# Altium PCB board1.PcbDoc
Units mil, origin at the board's own origin, x right, y up, seen from the top; angles counter-clockwise.
Board outline 3465 x 3690 mil, 2 copper layers (Top Layer, Bottom Layer); 50 components, 30 nets, 284 pads, 65 vias.
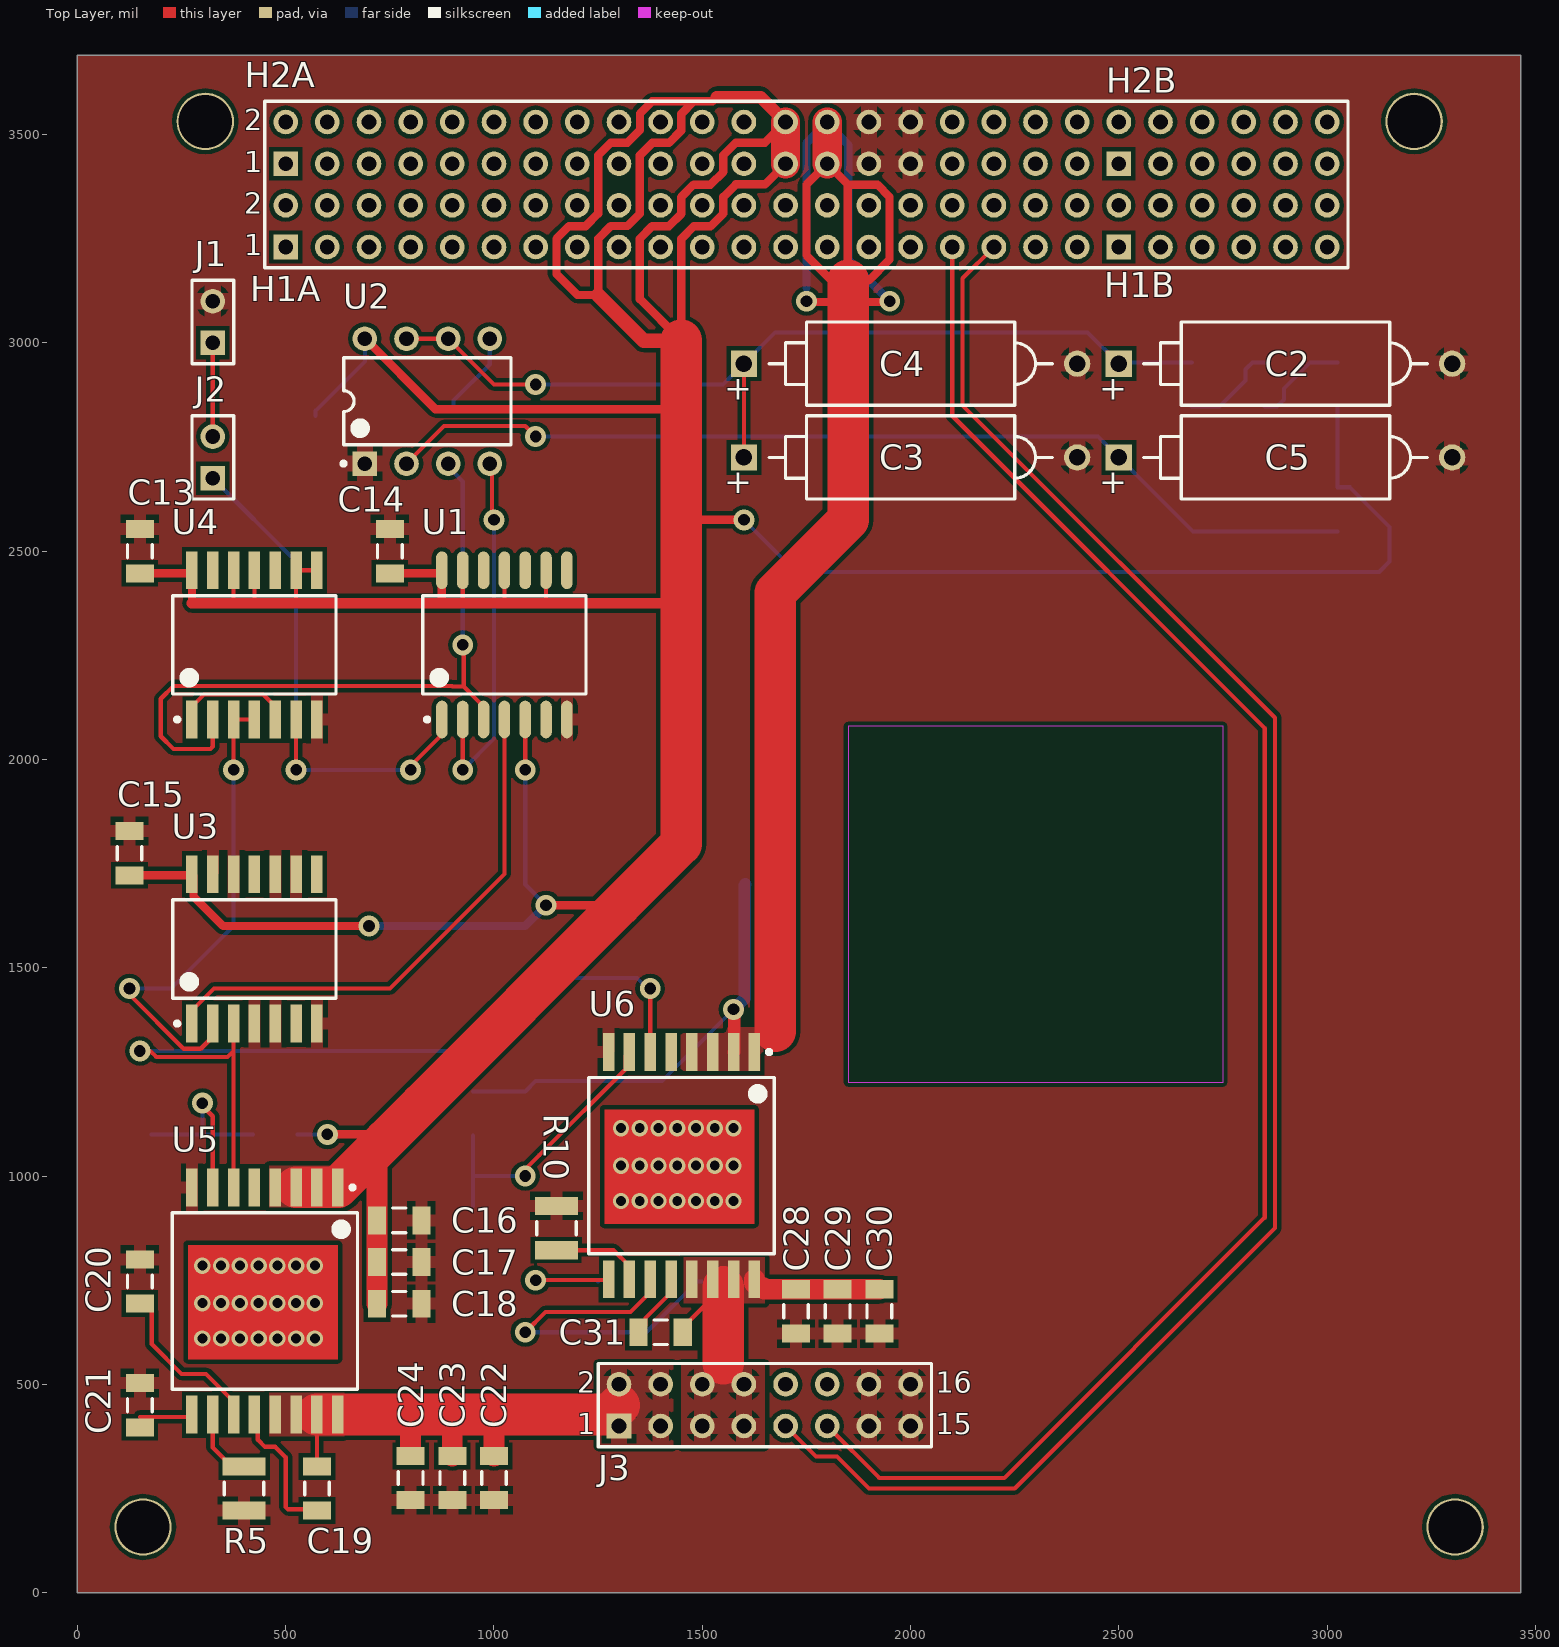
[diagram p0: Top Layer view]
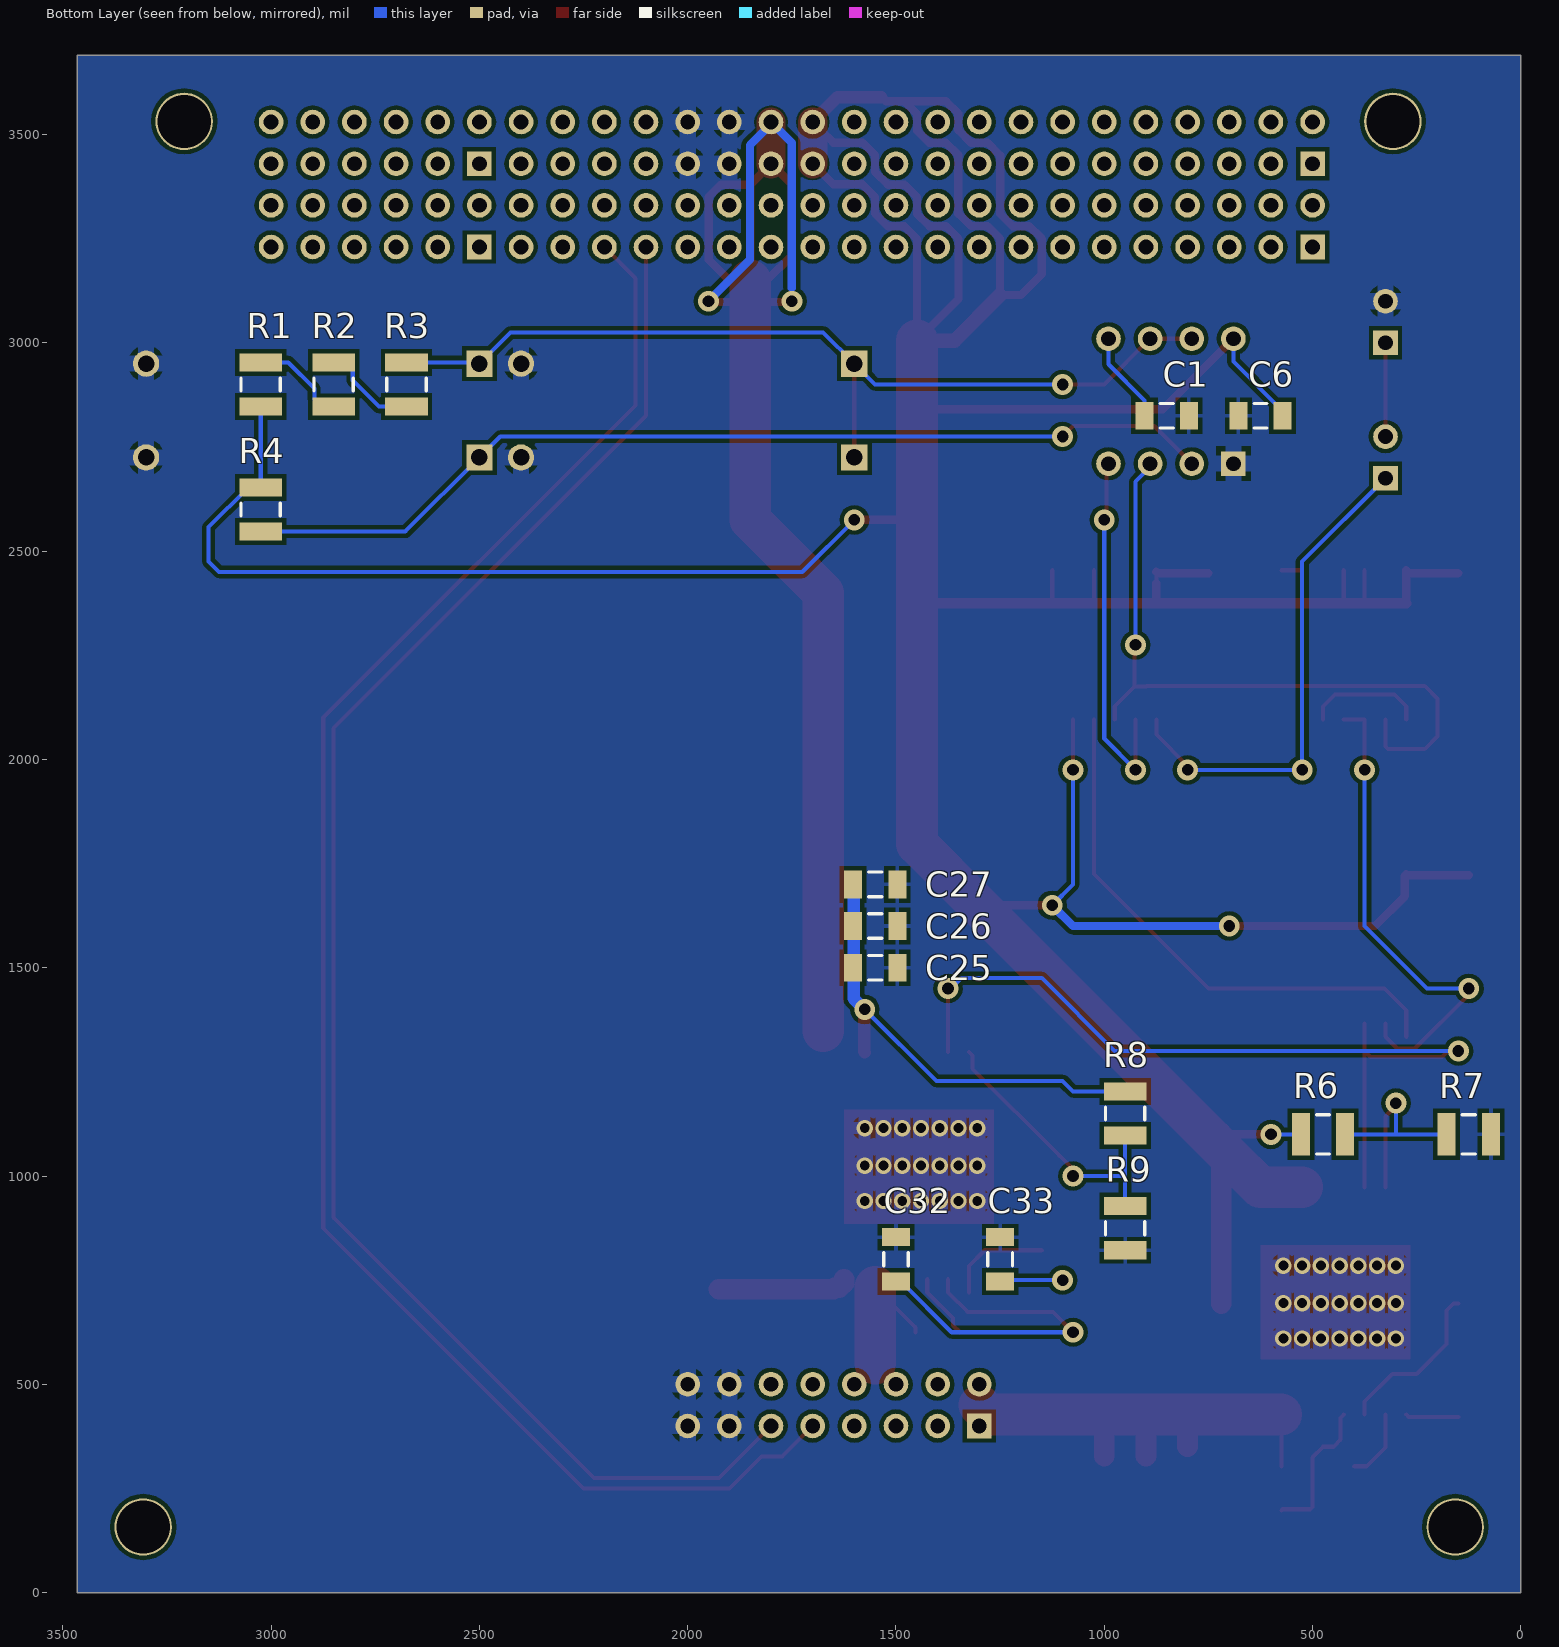
[diagram p1: Bottom Layer view, seen from below]

## Layer stack, top to bottom
Top Solder: solder mask 0.4, Solder Resist, Dk 3.5
Top Layer: signal copper 1.4
Dielectric 1: dielectric 12.6, FR-4, Dk 4.8
Bottom Layer: signal copper 1.4
Bottom Solder: solder mask 0.4, Solder Resist, Dk 3.5

## Board outline
0,0 0,3690 3465,3690 3465,0

## Design rules (kind name [scope] priority, off if disabled: settings)
Clearance Clearance_11 [InNamedPolygon('3V3_L01_P009')] p1: gap=10 ignorepadtopadclearanceinfootprint=FALSE except(0: Arc-Hole Track-Hole SMDPad-Hole THPad-Hole Via-Hole Fill-Hole Poly-Hole Region-Hole Text-Hole)
Clearance Clearance_10 [InNamedPolygon('3V3_L01_P009')] p2: gap=0 ignorepadtopadclearanceinfootprint=FALSE
Clearance Clearance_9 [InNamedPolygon('3V3_L01_P009')] p3: gap=10 ignorepadtopadclearanceinfootprint=FALSE except(0: Arc-Hole Track-Hole SMDPad-Hole THPad-Hole Via-Hole Fill-Hole Poly-Hole Region-Hole Text-Hole)
Clearance Clearance_8 [InNamedPolygon('3V3_L01_P009')] p4: gap=0 ignorepadtopadclearanceinfootprint=FALSE
Clearance Clearance_7 [InNamedPolygon('3V3_L01_P009')] p5: gap=10 ignorepadtopadclearanceinfootprint=FALSE
Clearance Clearance_6 [InNamedPolygon('3V3_L01_P009')] p6: gap=1 ignorepadtopadclearanceinfootprint=FALSE
Clearance Clearance_5 [InNamedPolygon('3V3_L01_P009')] p7: gap=0 ignorepadtopadclearanceinfootprint=FALSE
Clearance Clearance_4 [InNamedPolygon('GND_L01_P008')] p8: gap=10 ignorepadtopadclearanceinfootprint=FALSE except(0: Arc-Hole Track-Hole SMDPad-Hole THPad-Hole Via-Hole Fill-Hole Poly-Hole Region-Hole Text-Hole)
Clearance Clearance_3 [InNamedPolygon('tg')] p9: gap=0 ignorepadtopadclearanceinfootprint=FALSE
Clearance Clearance_2 [InNamedPolygon('5VLOAD_L01_P005')] p10: gap=0 ignorepadtopadclearanceinfootprint=FALSE
Clearance Clearance_1 [InNamedPolygon('tg')] p11: gap=0 ignorepadtopadclearanceinfootprint=FALSE
Clearance [All] p12: gap=10 ignorepadtopadclearanceinfootprint=FALSE except(0: Arc-Hole Track-Hole SMDPad-Hole THPad-Hole Via-Hole Fill-Hole Poly-Hole Region-Hole Text-Hole)
ComponentClearance ComponentClearance_4 [InComponent('H2B')] p1: gap=0 collisioncheckmode=3 verticalgap=0 showdistances=FALSE
ComponentClearance ComponentClearance_3 [InComponent('H2A')] p2: gap=0 collisioncheckmode=3 verticalgap=0 showdistances=FALSE
ComponentClearance ComponentClearance_2 [InComponent('H1B')] p3: gap=0 collisioncheckmode=3 verticalgap=0 showdistances=FALSE
ComponentClearance [InComponent('H1A')] p4: gap=0 collisioncheckmode=3 verticalgap=0 showdistances=FALSE
ComponentClearance ComponentClearance_1 [All] p5: gap=10 collisioncheckmode=3 verticalgap=10 showdistances=FALSE
PolygonConnect PolygonConnect_24 [All vs IsNamedPolygon('GND_L01_P008')] p1: thpad.connectstyle=Relief thpad.reliefconductorwidth=40 thpad.reliefentries=4 thpad.polygonreliefangle="90 Angle" thpad.airgapwidth=12 smdpad.connectstyle=Relief smdpad.reliefconductorwidth=30 smdpad.reliefentries=4 smdpad.polygonreliefangle="90 Angle" smdpad.airgapwidth=12 via.connectstyle=Relief via.reliefconductorwidth=30 via.reliefentries=4 via.polygonreliefangle="90 Angle" via.airgapwidth=10
PolygonConnect PolygonConnect_23 [All vs IsNamedPolygon('3V3LOAD_L01_P000')] p2: thpad.connectstyle=Relief thpad.reliefconductorwidth=10 thpad.reliefentries=4 thpad.polygonreliefangle="90 Angle" thpad.airgapwidth=10 smdpad.connectstyle=Direct smdpad.reliefconductorwidth=10 smdpad.reliefentries=4 smdpad.polygonreliefangle="90 Angle" smdpad.airgapwidth=10 via.connectstyle=Relief via.reliefconductorwidth=10 via.reliefentries=4 via.polygonreliefangle="90 Angle" via.airgapwidth=10
PolygonConnect PolygonConnect_22 [All vs IsNamedPolygon('ed')] p3: thpad.connectstyle=Relief thpad.reliefconductorwidth=40 thpad.reliefentries=4 thpad.polygonreliefangle="90 Angle" thpad.airgapwidth=12 smdpad.connectstyle=Relief smdpad.reliefconductorwidth=10 smdpad.reliefentries=4 smdpad.polygonreliefangle="90 Angle" smdpad.airgapwidth=10 via.connectstyle=Relief via.reliefconductorwidth=10 via.reliefentries=4 via.polygonreliefangle="90 Angle" via.airgapwidth=10
PolygonConnect PolygonConnect_21 [All vs IsNamedPolygon('ed')] p4: thpad.connectstyle=Relief thpad.reliefconductorwidth=40 thpad.reliefentries=4 thpad.polygonreliefangle="90 Angle" thpad.airgapwidth=10 smdpad.connectstyle=Relief smdpad.reliefconductorwidth=10 smdpad.reliefentries=4 smdpad.polygonreliefangle="90 Angle" smdpad.airgapwidth=10 via.connectstyle=Relief via.reliefconductorwidth=10 via.reliefentries=4 via.polygonreliefangle="90 Angle" via.airgapwidth=10
PolygonConnect PolygonConnect_20 [All vs IsNamedPolygon('ed')] p5: connectstyle=Direct reliefconductorwidth=10 reliefentries=4 polygonreliefangle="90 Angle" airgapwidth=10
PolygonConnect PolygonConnect_19 [All vs IsNamedPolygon('ed')] p6: thpad.connectstyle=Relief thpad.reliefconductorwidth=10 thpad.reliefentries=4 thpad.polygonreliefangle="90 Angle" thpad.airgapwidth=10 smdpad.connectstyle=Direct smdpad.reliefconductorwidth=10 smdpad.reliefentries=4 smdpad.polygonreliefangle="90 Angle" smdpad.airgapwidth=10 via.connectstyle=Relief via.reliefconductorwidth=10 via.reliefentries=4 via.polygonreliefangle="90 Angle" via.airgapwidth=10
PolygonConnect PolygonConnect_18 [All vs IsNamedPolygon('3V3_L01_P009')] p7: thpad.connectstyle=Relief thpad.reliefconductorwidth=10 thpad.reliefentries=4 thpad.polygonreliefangle="90 Angle" thpad.airgapwidth=10 smdpad.connectstyle=Direct smdpad.reliefconductorwidth=10 smdpad.reliefentries=4 smdpad.polygonreliefangle="90 Angle" smdpad.airgapwidth=10 via.connectstyle=Relief via.reliefconductorwidth=10 via.reliefentries=4 via.polygonreliefangle="90 Angle" via.airgapwidth=10
PolygonConnect PolygonConnect_17 [All vs IsNamedPolygon('3V3_L01_P009')] p8: thpad.connectstyle=Relief thpad.reliefconductorwidth=10 thpad.reliefentries=4 thpad.polygonreliefangle="90 Angle" thpad.airgapwidth=10 smdpad.connectstyle=Direct smdpad.reliefconductorwidth=10 smdpad.reliefentries=4 smdpad.polygonreliefangle="90 Angle" smdpad.airgapwidth=10 via.connectstyle=Relief via.reliefconductorwidth=10 via.reliefentries=4 via.polygonreliefangle="90 Angle" via.airgapwidth=10
PolygonConnect PolygonConnect_16 [All vs IsNamedPolygon('GND_L01_P008')] p9: thpad.connectstyle=Relief thpad.reliefconductorwidth=40 thpad.reliefentries=4 thpad.polygonreliefangle="90 Angle" thpad.airgapwidth=12 smdpad.connectstyle=Relief smdpad.reliefconductorwidth=10 smdpad.reliefentries=4 smdpad.polygonreliefangle="90 Angle" smdpad.airgapwidth=10 via.connectstyle=Relief via.reliefconductorwidth=40 via.reliefentries=4 via.polygonreliefangle="90 Angle" via.airgapwidth=12
PolygonConnect PolygonConnect_15 [All vs IsNamedPolygon('GND_L02_P003')] p10: thpad.connectstyle=Relief thpad.reliefconductorwidth=40 thpad.reliefentries=4 thpad.polygonreliefangle="90 Angle" thpad.airgapwidth=12 smdpad.connectstyle=Relief smdpad.reliefconductorwidth=10 smdpad.reliefentries=4 smdpad.polygonreliefangle="90 Angle" smdpad.airgapwidth=10 via.connectstyle=Relief via.reliefconductorwidth=40 via.reliefentries=4 via.polygonreliefangle="90 Angle" via.airgapwidth=12
PolygonConnect PolygonConnect_14 [All vs IsNamedPolygon('5VLOAD_L01_P002')] p11: thpad.connectstyle=Relief thpad.reliefconductorwidth=10 thpad.reliefentries=4 thpad.polygonreliefangle="90 Angle" thpad.airgapwidth=10 smdpad.connectstyle=Direct smdpad.reliefconductorwidth=10 smdpad.reliefentries=4 smdpad.polygonreliefangle="90 Angle" smdpad.airgapwidth=10 via.connectstyle=Relief via.reliefconductorwidth=10 via.reliefentries=4 via.polygonreliefangle="90 Angle" via.airgapwidth=10
PolygonConnect PolygonConnect_13 [All vs IsNamedPolygon('5VLOAD_L01_P005')] p12: thpad.connectstyle=Relief thpad.reliefconductorwidth=40 thpad.reliefentries=4 thpad.polygonreliefangle="90 Angle" thpad.airgapwidth=12 smdpad.connectstyle=Relief smdpad.reliefconductorwidth=10 smdpad.reliefentries=4 smdpad.polygonreliefangle="90 Angle" smdpad.airgapwidth=10 via.connectstyle=Relief via.reliefconductorwidth=10 via.reliefentries=4 via.polygonreliefangle="90 Angle" via.airgapwidth=10
PolygonConnect PolygonConnect_12 [All vs IsNamedPolygon('GND_L02_P003')] p13: thpad.connectstyle=Relief thpad.reliefconductorwidth=40 thpad.reliefentries=4 thpad.polygonreliefangle="90 Angle" thpad.airgapwidth=12 smdpad.connectstyle=Relief smdpad.reliefconductorwidth=10 smdpad.reliefentries=4 smdpad.polygonreliefangle="90 Angle" smdpad.airgapwidth=10 via.connectstyle=Relief via.reliefconductorwidth=10 via.reliefentries=4 via.polygonreliefangle="90 Angle" via.airgapwidth=10
PolygonConnect PolygonConnect_11 [All vs IsNamedPolygon('tg')] p14: thpad.connectstyle=Relief thpad.reliefconductorwidth=50 thpad.reliefentries=4 thpad.polygonreliefangle="90 Angle" thpad.airgapwidth=15 smdpad.connectstyle=Relief smdpad.reliefconductorwidth=10 smdpad.reliefentries=4 smdpad.polygonreliefangle="90 Angle" smdpad.airgapwidth=10 via.connectstyle=Relief via.reliefconductorwidth=10 via.reliefentries=4 via.polygonreliefangle="90 Angle" via.airgapwidth=10
PolygonConnect PolygonConnect_10 [All vs IsNamedPolygon('GND_L02_P003')] p15: thpad.connectstyle=Relief thpad.reliefconductorwidth=50 thpad.reliefentries=4 thpad.polygonreliefangle="90 Angle" thpad.airgapwidth=10 smdpad.connectstyle=Relief smdpad.reliefconductorwidth=10 smdpad.reliefentries=4 smdpad.polygonreliefangle="90 Angle" smdpad.airgapwidth=10 via.connectstyle=Relief via.reliefconductorwidth=10 via.reliefentries=4 via.polygonreliefangle="90 Angle" via.airgapwidth=10
PolygonConnect PolygonConnect_9 [All vs IsNamedPolygon('GND_L02_P003')] p16: thpad.connectstyle=Relief thpad.reliefconductorwidth=50 thpad.reliefentries=4 thpad.polygonreliefangle="90 Angle" thpad.airgapwidth=10 smdpad.connectstyle=Relief smdpad.reliefconductorwidth=10 smdpad.reliefentries=4 smdpad.polygonreliefangle="90 Angle" smdpad.airgapwidth=10 via.connectstyle=Relief via.reliefconductorwidth=10 via.reliefentries=4 via.polygonreliefangle="90 Angle" via.airgapwidth=10
PolygonConnect PolygonConnect_8 [All vs IsNamedPolygon('5V_L01_P007')] p17: thpad.connectstyle=Relief thpad.reliefconductorwidth=10 thpad.reliefentries=4 thpad.polygonreliefangle="90 Angle" thpad.airgapwidth=10 smdpad.connectstyle=Direct smdpad.reliefconductorwidth=10 smdpad.reliefentries=4 smdpad.polygonreliefangle="90 Angle" smdpad.airgapwidth=10 via.connectstyle=Relief via.reliefconductorwidth=10 via.reliefentries=4 via.polygonreliefangle="90 Angle" via.airgapwidth=10
PolygonConnect PolygonConnect_7 [All vs IsNamedPolygon('tg')] p18: thpad.connectstyle=Relief thpad.reliefconductorwidth=10 thpad.reliefentries=4 thpad.polygonreliefangle="90 Angle" thpad.airgapwidth=10 smdpad.connectstyle=Direct smdpad.reliefconductorwidth=10 smdpad.reliefentries=4 smdpad.polygonreliefangle="90 Angle" smdpad.airgapwidth=10 via.connectstyle=Relief via.reliefconductorwidth=10 via.reliefentries=4 via.polygonreliefangle="90 Angle" via.airgapwidth=10
PolygonConnect PolygonConnect_6 [All vs IsNamedPolygon('tg')] p19: thpad.connectstyle=Direct thpad.reliefconductorwidth=10 thpad.reliefentries=4 thpad.polygonreliefangle="90 Angle" thpad.airgapwidth=10 smdpad.connectstyle=Relief smdpad.reliefconductorwidth=10 smdpad.reliefentries=4 smdpad.polygonreliefangle="90 Angle" smdpad.airgapwidth=10 via.connectstyle=Relief via.reliefconductorwidth=10 via.reliefentries=4 via.polygonreliefangle="90 Angle" via.airgapwidth=10
PolygonConnect PolygonConnect_5 [All vs IsNamedPolygon('tg')] p20: thpad.connectstyle=Direct thpad.reliefconductorwidth=10 thpad.reliefentries=4 thpad.polygonreliefangle="90 Angle" thpad.airgapwidth=10 smdpad.connectstyle=Relief smdpad.reliefconductorwidth=10 smdpad.reliefentries=4 smdpad.polygonreliefangle="90 Angle" smdpad.airgapwidth=10 via.connectstyle=Relief via.reliefconductorwidth=10 via.reliefentries=4 via.polygonreliefangle="90 Angle" via.airgapwidth=10
PolygonConnect PolygonConnect_4 [All vs IsNamedPolygon('tg')] p21: thpad.connectstyle=Direct thpad.reliefconductorwidth=10 thpad.reliefentries=4 thpad.polygonreliefangle="90 Angle" thpad.airgapwidth=10 smdpad.connectstyle=Relief smdpad.reliefconductorwidth=10 smdpad.reliefentries=4 smdpad.polygonreliefangle="90 Angle" smdpad.airgapwidth=10 via.connectstyle=Relief via.reliefconductorwidth=10 via.reliefentries=4 via.polygonreliefangle="90 Angle" via.airgapwidth=10
PolygonConnect PolygonConnect_3 [All vs IsNamedPolygon('tg')] p22: thpad.connectstyle=Direct thpad.reliefconductorwidth=10 thpad.reliefentries=4 thpad.polygonreliefangle="90 Angle" thpad.airgapwidth=10 smdpad.connectstyle=Relief smdpad.reliefconductorwidth=10 smdpad.reliefentries=4 smdpad.polygonreliefangle="90 Angle" smdpad.airgapwidth=10 via.connectstyle=Relief via.reliefconductorwidth=10 via.reliefentries=4 via.polygonreliefangle="90 Angle" via.airgapwidth=10
PolygonConnect PolygonConnect_2 [All vs IsNamedPolygon('5VLOAD_L01_P005')] p23: thpad.connectstyle=Relief thpad.reliefconductorwidth=50 thpad.reliefentries=4 thpad.polygonreliefangle="90 Angle" thpad.airgapwidth=10 smdpad.connectstyle=Relief smdpad.reliefconductorwidth=10 smdpad.reliefentries=4 smdpad.polygonreliefangle="90 Angle" smdpad.airgapwidth=10 via.connectstyle=Relief via.reliefconductorwidth=10 via.reliefentries=4 via.polygonreliefangle="90 Angle" via.airgapwidth=10
PolygonConnect PolygonConnect_1 [All vs IsNamedPolygon('tt')] p24: thpad.connectstyle=Relief thpad.reliefconductorwidth=10 thpad.reliefentries=4 thpad.polygonreliefangle="90 Angle" thpad.airgapwidth=10 smdpad.connectstyle=Direct smdpad.reliefconductorwidth=10 smdpad.reliefentries=4 smdpad.polygonreliefangle="90 Angle" smdpad.airgapwidth=10 via.connectstyle=Relief via.reliefconductorwidth=10 via.reliefentries=4 via.polygonreliefangle="90 Angle" via.airgapwidth=10
PolygonConnect [All] p25: connectstyle=Relief reliefconductorwidth=10 reliefentries=4 polygonreliefangle="90 Angle" airgapwidth=10
RoomDefinition board1 [InComponentClass('board1')] p1: confinementstyle=ConfineIn formatcopy=TRUE lockcomponents=FALSE outline 0,3800 3450,3800 3450,0 0,0
RoutingVias [All] p1: holewidth=28 width=50 viastyle="Through Hole" minholewidth=28 minwidth=50 maxholewidth=28 maxwidth=50
SilkToSilkClearance SilkToSilkClearance_1 [(InComponent('H1A') OR InComponent('H1B') OR InComponent('H2A') OR InComponent('H2B'))] p1: silktosilkclearance=0
SilkToSilkClearance [All] p2: silktosilkclearance=10
SolderMaskExpansion [All] p1: expansion=4 istentingtop=FALSE
Width [All] p1: maxlimit=100 minlimit=10 preferedwidth=10 minimp=50.000000 maximp=50.000000 favimp=50.000000
28 further rules are at their usual default settings.

## Components (designator, comment, footprint, x,y, rotation, side; value= is the part's Value field where it differs from the comment)
C1 "Cap Semi" C1206 850,2825 r180 bottom value=10nF
C2 "Cap Pol2" POLAR0.8 2900,2950 r180 top value=1800uF
C3 "Cap Pol2" POLAR0.8 2000,2725 r180 top value=1800uF
C4 "Cap Pol2" POLAR0.8 2000,2950 r180 top value=1800uF
C5 "Cap Pol2" POLAR0.8 2900,2725 r180 top value=1800uF
C6 "Cap Semi" C1206 625,2825 r0 bottom value=100n
C13 "Cap Semi" C1206 150,2500 r270 top value=100nF
C14 "Cap Semi" C1206 750,2500 r90 top value=100nF
C15 "Cap Semi" C1206 125,1775 r270 top value=100nF
C16 "Cap Semi" C1206 772.34,893.46 r180 top value=100nF
C17 "Cap Semi" C1206 772.34,793.46 r180 top value=10uF
C18 "Cap Semi" C1206 772.34,693.46 r180 top value=220uF
C19 "Cap Semi" C1206 575,250 r270 top value=220nF
C20 "Cap Semi" C1206 150,746.85 r90 top value=220nF
C21 "Cap Semi" C1206 150,450 r90 top value=110nF
C22 "Cap Semi" C1206 1000,275 r90 top value=220uF
C23 "Cap Semi" C1206 900,275 r90 top value=10uF
C24 "Cap Semi" C1206 800,275 r90 top value=100nF
C25 "Cap Semi" C1206 1550,1500 r0 bottom value=220uF
C26 "Cap Semi" C1206 1550,1600 r0 bottom value=10uF
C27 "Cap Semi" C1206 1550,1700 r0 bottom value=100nF
C28 "Cap Semi" C1206 1725,675 r90 top value=220uF
C29 "Cap Semi" C1206 1825,675 r90 top value=10uF
C30 "Cap Semi" C1206 1925,675 r90 top value=100nF
C31 "Cap Semi" C1206 1400,625 r180 top value=220nF
C32 "Cap Semi" C1206 1500,800 r90 bottom value=220nF
C33 "Cap Semi" C1206 1250,800 r90 bottom value=110nF
H1A "Header 20X2" HDR2X20 500,3230 r0 top locked
H1B "Header 6X2" HDR2X6 2500,3230 r0 top locked
H2A "Header 20X2" HDR2X20 500,3430 r0 top locked
H2B "Header 6X2" HDR2X6 2500,3430 r0 top locked
J1 "Switch 1" HDR1X2 325,3000 r90 top
J2 "Switch 2" HDR1X2 325,2675 r90 top
J3 "Header 8X2" HDR2X8 1300,400 r0 top
R1 "Res3" 14-1210 3025,2900 r270 bottom value=132K
R2 "Res3" 14-1210 2850,2900 r270 bottom value=132K
R3 "Res3" 14-1210 2675,2900 r270 bottom value=73K
R4 "Res3" 14-1210 3025,2600 r90 bottom value=100K
R5 "Res3" 14-1210 400,250 r270 top value=10K
R6 "Res3" 14-1210 475,1100 r0 bottom value=100K
R7 "Res3" 14-1210 125,1100 r0 bottom value=12K
R8 "Res3" 14-1210 950,1150 r90 bottom value=100K
R9 "Res3" 14-1210 950,875 r90 bottom value=20K
R10 "Res3" 14-1210 1150,875 r90 top value=10K
U1 "SN54LS14-SP" SN54LS14-SP 1025,2275 r90 top
U2 "SE555-SP" P0008A 840,2860 r90 top
U3 "SN54LS08-SP" SN54LS08-SP 425,1545 r90 top
U4 "SN54LS02-SP" SN54LS02-SP 425,2275 r90 top
U5 "TPS7H2201-SP" TPS7H2201-SP 450,700 r270 top
U6 "TPS7H2201-SP" TPS7H2201-SP 1450,1025 r270 top

## Footprints (in the part's own frame and the unit in brackets; to place one, negate y for a bottom-side part, rotate by r counter-clockwise, add the part's x,y. Pads: shape width x height; smd on the part's side, far side on the other; paste and mask are expansions set on the pad)
14-1210 [mm] "Chip Resistor, Body 3.2x2.5mm, IPC High Density"
  rect 1.1x2.6 smd: 1(-1.35,0) 2(1.35,0)
  silkscreen extent -0.4,-1.2 0.4,1.2, body extent -1.68,-1.32 1.68,1.32, height 0.9
C1206 [mm] "Chip Capacitor, Body 3.2x1.6mm, IPC High Density"
  rect 1.1x1.7 smd: 1(-1.35,0) 2(1.35,0)
  silkscreen extent -0.4,-0.75 0.4,0.75, body extent -1.7,-0.9 1.7,0.9, height 1.3
HDR1X2 [mm] "Connector; Header; 2 Position"
  rect 1.5x1.5 hole 0.9: 1(0,0)
  round 1.5 hole 0.9: 2(2.54,0)
  silkscreen extent -1.27,-1.27 3.81,1.27
HDR2X6 [mm] "Connector; Header; 6x2 Position"
  rect 1.5x1.5 hole 0.9: 1(0,0)
  round 1.5 hole 0.9: 2(0,2.54) 3(2.54,0) 4(2.54,2.54) 5(5.08,0) 6(5.08,2.54) 7(7.62,0) 8(7.62,2.54) 9(10.16,0) 10(10.16,2.54) 11(12.7,0) 12(12.7,2.54)
  silkscreen extent -1.27,-1.27 13.97,3.81
HDR2X8 [mm] "Connector; Header; 8x2 Position"
  rect 1.5x1.5 hole 0.9: 1(0,0)
  round 1.5 hole 0.9: 2(0,2.54) 3(2.54,0) 4(2.54,2.54) 5(5.08,0) 6(5.08,2.54) 7(7.62,0) 8(7.62,2.54) 9(10.16,0) 10(10.16,2.54) 11(12.7,0) 12(12.7,2.54) 13(15.24,0) 14(15.24,2.54) 15(17.78,0) 16(17.78,2.54)
  silkscreen extent -1.27,-1.27 19.05,3.81
HDR2X20 [mm] "Connector; Header; 20x2 Position"
  rect 1.5x1.5 hole 0.9: 1(0,0)
  round 1.5 hole 0.9: 2(0,2.54) 3(2.54,0) 4(2.54,2.54) 5(5.08,0) 6(5.08,2.54) 7(7.62,0) 8(7.62,2.54) 9(10.16,0) 10(10.16,2.54) 11(12.7,0) 12(12.7,2.54) 13(15.24,0) 14(15.24,2.54) 15(17.78,0) 16(17.78,2.54) 17(20.32,0) 18(20.32,2.54) 19(22.86,0) 20(22.86,2.54) 21(25.4,0) 22(25.4,2.54) 23(27.94,0) 24(27.94,2.54) 25(30.48,0) 26(30.48,2.54) 27(33.02,0) 28(33.02,2.54) 29(35.56,0) 30(35.56,2.54) 31(38.1,0) 32(38.1,2.54) 33(40.64,0) 34(40.64,2.54) 35(43.18,0) 36(43.18,2.54) 37(45.72,0) 38(45.72,2.54) 39(48.26,0) 40(48.26,2.54)
  silkscreen extent -1.27,-1.27 49.53,3.81
P0008A [mm] "DIP, 8-Leads, Body 10.15x6.6mm, Pitch 2.54mm"
  rect 1.5x1.5 hole 0.9: 1(-3.81,3.81)
  round 1.5 hole 0.9: 2(-3.81,1.27) 3(-3.81,-1.27) 4(-3.81,-3.81) 5(3.81,-3.81) 6(3.81,-1.27) 7(3.81,1.27) 8(3.81,3.81)
  silkscreen extent -3.93,-5.1 2.65,5.23, body extent -3.95,-5.07 3.95,5.07, height 5.08
POLAR0.8 [mm] "Polarized Capacitor; 2 Leads"
  rect 1.6x1.6 hole 1: 1(10.16,0)
  round 1.6 hole 1: 2(-10.16,0)
  silkscreen extent -8.64,-2.54 8.64,2.54
SN54LS02-SP [mm] "NOR gate"
  rect 2.3x0.7 smd: 1(-4.55,3.81) 2(-4.55,2.54) 3(-4.55,1.27) 4(-4.55,0) 5(-4.55,-1.27) 6(-4.55,-2.54) 7(-4.55,-3.81) 8(4.55,-3.81) 9(4.55,-2.54) 10(4.55,-1.27) 11(4.55,0) 12(4.55,1.27) 13(4.55,2.54) 14(4.55,3.81)
  silkscreen extent -4.67,-4.97 3,4.97, body extent -5.29,-4.95 5.29,4.95, height 2.03
SN54LS08-SP [mm]
  rect 2.3x0.7 smd: 1(-4.55,3.81) 2(-4.55,2.54) 3(-4.55,1.27) 4(-4.55,0) 5(-4.55,-1.27) 6(-4.55,-2.54) 7(-4.55,-3.81) 8(4.55,-3.81) 9(4.55,-2.54) 10(4.55,-1.27) 11(4.55,0) 12(4.55,1.27) 13(4.55,2.54) 14(4.55,3.81)
  silkscreen extent -4.67,-4.97 3,4.97, body extent -3.3,-4.95 3.3,4.95, height 2.03
SN54LS14-SP [mm] "CFP, 14-Leads, Body 9.91x6.60mm (max), Pitch 1.27mm, IPC Medium Density"
  oval 2.3x0.7 smd: 1(-4.55,3.81) 2(-4.55,2.54) 3(-4.55,1.27) 4(-4.55,0) 5(-4.55,-1.27) 6(-4.55,-2.54) 7(-4.55,-3.81) 8(4.55,-3.81) 9(4.55,-2.54) 10(4.55,-1.27) 11(4.55,0) 12(4.55,1.27) 13(4.55,2.54) 14(4.55,3.81)
  silkscreen extent -4.67,-4.97 3,4.97, body extent -3.3,-4.95 3.3,4.95, height 2.03
TPS7H2201-SP [mm]
  rect 2.3x0.7 smd: 1(-6.925,4.445) 2(-6.925,3.175) 3(-6.925,1.905) 4(-6.925,0.635) 5(-6.925,-0.635) 6(-6.925,-1.905) 7(-6.925,-3.175) 8(-6.925,-4.445) 9(6.925,-4.445) 10(6.925,-3.175) 11(6.925,-1.905) 12(6.925,-0.635) 13(6.925,0.635) 14(6.925,1.905) 15(6.925,3.175) 16(6.925,4.445)
  Top Layer region: -3.429,-4.699 3.556,-4.699 3.556,4.445 -3.429,4.445
  silkscreen extent -7.05,-5.65 5.38,5.65, body extent -4.94,-5.63 4.94,5.63, height 2.34

## Part data
C1 C6 C13 C14 C15 C16 C17 C18 C19 C20 C21 C22 C23 C24 C25 C26 C27 C28 C29 C30 C31 C32 C33: "Capacitor (Semiconductor SIM Model)", LatestRevisionDate=29-May-2009, LatestRevisionNote="IPC-7351 Footprint Added.", PackageDescription="Chip Capacitor", PackageReference=C1206, Published=8-Jun-2000, Publisher="Altium Limited"
C2 C3 C4 C5: "Polarized Capacitor (Axial)", LatestRevisionDate=17-Jul-2002, LatestRevisionNote="Re-released for DXP Platform.", PackageDescription="Polarized Capacitor; 2 Leads", PackageReference=POLAR0.8, Published=8-Jun-2000, Publisher="Altium Limited"
H1A H2A: "Header, 20-Pin, Dual row", LatestRevisionDate=17-Jul-2002, LatestRevisionNote="Re-released for DXP Platform.", Publisher="Altium Limited"
H1B H2B: "Header, 6-Pin, Dual row", LatestRevisionDate=17-Jul-2002, LatestRevisionNote="Re-released for DXP Platform.", Publisher="Altium Limited"
J1 J2: library part "Header 2", "Header, 2-Pin", LatestRevisionDate=17-Jul-2002, LatestRevisionNote="Re-released for DXP Platform.", Publisher="Altium Limited"
J3: "Header, 8-Pin, Dual row", LatestRevisionDate=17-Jul-2002, LatestRevisionNote="Re-released for DXP Platform.", Publisher="Altium Limited"
R1 R2 R3 R4 R5 R6 R7 R8 R9 R10: "Resistor", LatestRevisionDate=29-May-2009, LatestRevisionNote="IPC-7351 Footprint Added.", PackageDescription="Chip Resistor", Published=8-Jun-2000, Publisher="Altium Limited"
  R1: PackageReference=14-1210
  R2 R3 R4 R5 R6 R7 R8 R9 R10: PackageReference=J1-0603
U1: "Invertor"
U2: library part CMP-2000-04954-1, "Precision Timer, 4.5 to 16 V, -55 to 125 degC, 8-Pin DIP, Pb-Free, Tube", Manufacturer=TexasInstruments, Maximum High Level Output Current=-200mA, Maximum Low Level Output Current=200mA, Operating Supply Voltage=5, Package=8PDIP, Package Description="8-Pin Double In-line Package, Body 9.59 x 6.35 mm, Pitch 2.54 mm", Package Reference=P8, Category=Timer, Datasheet URL=http://www.ti.com/general/docs/lit/getliterature.tsp?genericPartNumber=NE555&fileType=pdf, Datasheet Version="Rev. I, 09/2014", Manufacturer URL=http://www.ti.com/, Number of Internal Timers=1, Package URL=http://www.ti.com/lit/ml/mpdi001b/mpdi001b.pdf, Packaging=Rail/Tube, Rad Hard=No, Type=Standard
U3: "AND gate"
U4: "NOR gate"

## Free pads (board coordinates)
  round 137.8 hole 127.95: MOUNT1(307.09,3531.5) MOUNT2(3208.66,3531.5) MOUNT3(157.48,157.48) MOUNT4(3307.09,157.48)

## Via types
v1: diameter 39.37, hole 23.62, Top Layer to Bottom Layer, 42 vias
v2: diameter 50, hole 28, Top Layer to Bottom Layer, 23 vias

## Nets (pads, with @x,y where several pads share a name; then routed paths per layer and width w, separated by ;. In a path a pad name is that pad's centre, name@x,y a point inside that pad or via, vN(x,y) a via of type N, cw(c..) or ccw(c..) an arc to the next point about the centre after c; other vN are vias at no path point)
3V3: C25.2 C26.2 C27.2 H2A.27 H2A.28 R8.2 U6.1 U6.2 U6.3 U6.4 | length 5289.2
  Top Layer w20: v2(1750,3100) 1751.82,3098.18 1850,3098.18 1948.18,3098.18 v2(1950,3100) ; 1850,3150 1900,3150 1949.53,3199.53 1949.53,3350.51 1920.52,3379.53 1850.47,3379.53 1849.53,3380.47 ; 1849.53,3380.47 1849.53,3150.47 1809.48,3150.47 1750,3209.96 1750,3380 H2A.27 1849.53,3380.47
  Top Layer w30: U6.2 1576.22,1298.86 1576.22,1398.78 v2(1575,1400)
  Top Layer w70: H2A.27 H2A.28
  Top Layer w100: 1675,1347.64 1675,2400 1850,2575 1850,3098.18 1850,3150
  Bottom Layer w10: R8.2 1075,1203.15 1100,1228.15 1403.15,1228.15 v2(1575,1400) ; v2(1750,3100) 1750,3131.57 ; H2A.28@1800,3525 H2A.28
  Bottom Layer w20: 1750,3131.57 1750,3480 H2A.28 ; H2A.28@1800,3525 1850.47,3474.53 1850.47,3199.53 v2(1950,3100)
  Bottom Layer w30: v2(1575,1400) 1601.57,1426.57 1601.57,1698.43 C27.2
3V3LOAD: C28.2 C29.2 C30.2 C31.1 J3.5 J3.6 J3.7 J3.8 U6.13 U6.14 U6.15 U6.16 | length 664.1
  Top Layer w10: C31.1 1453.15,636.81 1550,733.66 1550,750
  Top Layer w50: U6.16 1625,743.31 1636.22,732.09 1645.28,732.09 1649.21,728.15 C28.2 C29.2 C30.2
  Top Layer w100: 1550,550 1550,733.66
5V: C6.1 C13.2 C14.1 C15.2 C16.2 C17.2 C18.2 H2A.25 H2A.26 R1.2 R4.2 R6.2 U1.5 U1.9 U1.11 U1.13 U1.14 U2.8 U3.14 U4.8 U4.9 U4.11 U4.12 U4.14 U5.1 U5.2 U5.3 U5.4 | length 13676.6
  Top Layer w10: U4.14@267.72,2446.85 U4.14 ; U3.14@272.72,1721.85 U3.14 ; 375,2375 U4.12 ; 425,2375 U4.11 ; 525,2375 U4.9 U4.8 ; U1.14@875,2422.64 875,2450.34 U1.14 ; 925,2375 U1.13 ; 1025,2375 U1.11 ; v2(1075,1975) U1.5 ; 1125,2375 U1.9 ; 1430.49,2840.96 1449.53,2860 ; 1459.41,2640 1459.41,2660 ; 1684.53,3474.53 1700,3490
  Top Layer w20: C15.2 U3.14@272.72,1721.85 ; C13.2 U4.14@267.72,2446.85 ; U3.14 278.78,1720.35 278.78,1671.22 350,1600 v2(700,1600) ; 275,2375 U4.14 ; v2(600,1100) 725,1100 738.68,1086.32 ; U2.8 859.04,2840.96 1430.49,2840.96 ; C14.1 871.51,2446.85 U1.14@875,2450.34 ; 875,2375 U1.14@875,2422.64 ; v2(1125,1650) 1302.36,1650 1338.68,1686.32 ; 1419.06,2975 1449.53,3005.47 ; 1449.53,2575 v2(1600,2575) ; 1450,3005 1449.53,3005.47 ; 1535,3590 1524.53,3579.53 1479.48,3579.53 ; H2A.26@1680,3510 1650.47,3480.47 1580.43,3480.47 1550.47,3450.51 1550.47,3410.43 1519.57,3379.53 1479.48,3379.53 1449.53,3349.57 1449.53,3309.49 1420.04,3280 1379.96,3280 1350,3250.04 1350,3105 1449.53,3005.47 ; H2A.25 1650.47,3380.47 1580.43,3380.47 1550.47,3350.51 1550.47,3310.43 1519.57,3279.53 1479.48,3279.53 1449.53,3249.57 1449.53,3005.47 ; 1479.48,3579.53 1379.48,3579.53 1350.47,3550.51 1350.47,3510.43 1320.51,3480.47 1280.43,3480.47 1250,3450.04 1250,3309.96 1220.28,3280.24 1180.19,3280.24 1150,3250.04 1150,3165 1200,3115 1250,3115 1250.47,3114.53 1250.47,3250.51 1280.31,3280.35 1320.4,3280.35 1350.24,3310.19 1350.24,3450.28 1379.96,3480 1420.04,3480 1449.53,3509.49 1449.53,3549.57 1479.48,3579.53
  Top Layer w25: 275,2375 375,2375 425,2375 525,2375 875,2375 925,2375 1025,2375 1125,2375 1449.53,2375
  Top Layer w30: 701.18,1048.82 719.19,1030.81 ; 738.68,1086.32 746.85,1078.15 ; 1535,3590 1640,3590 H2A.26
  Top Layer w35: 1250.47,3114.53 1359.53,3005.47 1449.53,3005.47
  Top Layer w50: C18.2 C17.2 C16.2 719.19,1030.81
  Top Layer w70: H2A.25 1700,3490 H2A.26
  Top Layer w100: U5.3 U5.2 U5.1 701.18,1048.82 738.68,1086.32 826.18,1173.82 1302.36,1650 1449.53,1797.17 1449.53,2375 1449.53,2575 1449.53,2860 1449.53,3005.47
  Bottom Layer w10: R6.2 v2(600,1100) ; C6.1 571.85,2836.81 690,2954.96 U2.8 ; v2(1075,1975) 1075,1700 v2(1125,1650) ; v2(1600,2575) 1725,2450 3125,2450 3150,2475 3150,2557.68 3054.53,2653.15 R4.2 R1.2
  Bottom Layer w20: v2(700,1600) 1075,1600 v2(1125,1650)
5VLOAD: C19.1 C22.2 C23.2 C24.2 J3.1 J3.2 J3.3 J3.4 U5.13 U5.14 U5.15 U5.16 | length 1148.5
  Top Layer w10: C19.1 U5.15 ; 1250,460 1260,450
  Top Layer w50: 800,350 800,427.36 ; C23.2 900,427.36 ; C22.2 1000,427.36
  Top Layer w100: U5.15 U5.16 800,427.36 900,427.36 1000,427.36 1277.36,427.36 1300,450
AND1A: U1.4 U3.1 | length 1319.6
  Top Layer w10: U3.1@275,1334.37 U3.1 275,1397.36 327.64,1450 750,1450 1025,1725 U1.4
AND1B: U3.2 U4.3 U4.4 | length 1169.7
  Top Layer w10: v2(125,1450) 125,1435.6 255.01,1305.59 296.22,1305.59 325,1334.37 U3.2 ; v2(375,1975) U4.3 U4.4
  Bottom Layer w10: v2(125,1450) 225,1450 375,1600 v2(375,1975)
AND1Y: U3.3 U5.6 U6.6 | length 2090.4
  Top Layer w10: v2(150,1300) 175,1300 189.41,1285.59 360.59,1285.59 375,1300 ; U5.6 375,1300 ; U3.3 375,1300 ; U6.6 v2(1375,1450)
  Bottom Layer w10: v2(150,1300) 975,1300 1150,1475 1343.43,1475 1368.43,1450 v2(1375,1450)
EPS_RX: H1A.33 J3.11 | length 4001.3
  Top Layer w10: J3.11 1925,275 2225,275 2850,900 2850,2075 2100,2825 H1A.33
EPS_TX: H1A.35 J3.9 | length 4192.7
  Top Layer w10: J3.9 1773.2,326.8 1823.2,326.8 1825.54,324.45 1900,250 2250,250 2875,875 2875,2100 2125,2850 2125,3155 H1A.35
GND: C1.2 C2.2 C3.2 C4.2 C5.2 C6.2 C13.1 C14.2 C15.1 C16.1 C17.1 C18.1 C20.2 C21.2 C22.1 C23.1 C24.1 C25.1 C26.1 C27.1 C28.1 C29.1 C30.1 C32.2 C33.2 H2A.29 H2A.30 H2A.31 H2A.32 J1.2 J3.13 J3.14 J3.15 J3.16 R5.2 R7.1 R9.1 R10.2 U1.7 U2.1 U3.4 U3.5 U3.7 U3.9 U3.10 U3.12 U3.13 U4.7 U5.8 U6.8
  other v1: 300,610 345,610 390,610 435,610 480,610 525,610 570,610 300,695 345,695 390,695 435,695 480,695 525,695 570,695 300,785 345,785 390,785 435,785 480,785 525,785 570,785 1305,940 1350,940 1395,940 1440,940 1485,940 1530,940 1575,940 1305,1025 1350,1025 1395,1025 1440,1025 1485,1025 1530,1025 1575,1025 1305,1115 1350,1115 1395,1115 1440,1115 1485,1115 1530,1115 1575,1115
NetC1_1: C1.1 U2.5 | length 196
  Bottom Layer w10: C1.1@903.15,2850 903.15,2861.81 990,2948.66 U2.5
NetC2_1: C2.1 C3.1 C4.1 R3.1 U2.6 U2.7 | length 2277.2
  Top Layer w10: U2.7 U2.6 1000,2900 v2(1100,2900) ; C3.1 C4.1 ; C2.1@2473.5,2976.5 C2.1
  Bottom Layer w10: v2(1100,2900) 1550,2900 C4.1 1675,3025 2425,3025 C2.1 2503.15,2953.15 R3.1
NetC5_1: C5.1 R4.1 U2.2 | length 2377.1
  Top Layer w10: U2.2 880,2800 1075,2800 v2(1100,2775)
  Bottom Layer w10: v2(1100,2775) 2450,2775 C5.1 2678.15,2546.85 R4.1
NetC19_2: C19.2 U5.12 | length 345.9
  Top Layer w10: U5.12 432.91,419.45 432.91,367.09 450,350 475,350 500,325 500,205.86 505.86,200 571.85,200 C19.2
NetC20_1: C20.1 U5.11 | length 400.9
  Top Layer w10: C20.1 161.81,693.7 178.46,677.05 178.46,596.54 250,525 308.86,525 375,458.86 U5.11
NetC21_1: C21.1 U5.9 | length 127.3
  Top Layer w10: 150,421.85 269.49,421.85 U5.9
NetC31_2: C31.2 U6.12 | length 159.7
  Top Layer w10: C31.2 1363.5,641.65 1363.5,659.37 1425,720.87 U6.12
NetC32_1: C32.1 U6.11 | length 846.7
  Top Layer w10: v2(1075,625) 1123.46,673.46 1327.6,673.46 1375,720.87 U6.11
  Bottom Layer w10: v2(1075,625) 1366.34,625 1488.19,746.85 C32.1
NetC33_1: C33.1 U6.9 | length 327.3
  Top Layer w10: v2(1100,750) 1272.64,750 U6.9
  Bottom Layer w10: v2(1100,750) 1246.85,750 C33.1
NetJ1_1: J1.1 J2.2 | length 225
  Top Layer w10: J2.2 J1.1
NetR1_1: R1.1 R2.2 | length 234.9
  Bottom Layer w10: R2.2 2879.53,2846.85 2896.18,2863.5 2896.18,2890.51 2958.82,2953.15 R1.1
NetR2_1: R2.1 R3.2 | length 234.9
  Bottom Layer w10: R3.2 2741.18,2846.85 2803.82,2909.49 2803.82,2936.5 2820.47,2953.15 R2.1
NetR5_1: R5.1 U5.10 | length 172.6
  Top Layer w10: U5.10 325,348.62 370.47,303.15 R5.1
NetR6_1: R6.1 R7.2 U5.7 | length 531.4
  Top Layer w10: v2(300,1175) 300,1168.43 325,1143.43 U5.7
  Bottom Layer w10: R7.2 300,1100 ; v2(300,1175) 300,1100 ; R6.1 300,1100
NetR8_1: R8.1 R9.2 U6.7 | length 694.9
  Top Layer w10: v2(1075,1000) 1082.65,1007.65 1082.65,1023.8 1108.86,1050 1316.22,1257.36 1316.22,1288.86 U6.7
  Bottom Layer w10: R9.2 950,1000 ; R8.1 950,1000 ; v2(1075,1000) 950,1000
NetR10_1: R10.1 U6.10 | length 253.7
  Top Layer w10: R10.1 1287.01,821.85 1325,783.86 U6.10 U6.10@1325,720.87
NOR1A: U1.3 U2.3 U4.2 | length 1689.9
  Top Layer w10: U4.2 325,2030.86 319.14,2025 230.59,2025 200,2055.59 200,2145.55 230.59,2176.14 898.86,2176.14 900,2175 927.36,2175 ; U2.3@885,2710 U2.3 ; v2(925,2275) 927.36,2272.64 927.36,2175 ; U1.3 975,2127.36 927.36,2175
  Bottom Layer w10: U2.3 890,2701.72 925,2666.72 v2(925,2275)
NOR1Y: U4.1 U4.5 | length 286.8
  Top Layer w10: U4.1 275,2127.36 303.78,2156.14 446.22,2156.14 475,2127.36 U4.5
NOR2B: J2.1 U1.1 U4.6 | length 1330.6
  Top Layer w10: v2(525,1975) U4.6 ; v2(800,1975) 800,1984.62 875,2059.62 U1.1
  Bottom Layer w10: J2.1 525,2475 v2(525,1975) v2(800,1975)
NOT1Y: U1.2 U2.4 | length 891.1
  Top Layer w10: v2(925,1975) U1.2 ; U2.4 995,2705 995,2580 v2(1000,2575)
  Bottom Layer w10: v2(925,1975) 1000,2050 v2(1000,2575)
pads on no net: H1A.1 H1A.2 H1A.3 H1A.4 H1A.5 H1A.6 H1A.7 H1A.8 H1A.9 H1A.10 H1A.11 H1A.12 H1A.13 H1A.14 H1A.15 H1A.16 H1A.17 H1A.18 H1A.19 H1A.20 H1A.21 H1A.22 H1A.23 H1A.24 H1A.25 H1A.26 H1A.27 H1A.28 H1A.29 H1A.30 H1A.31 H1A.32 H1A.34 H1A.36 H1A.37 H1A.38 H1A.39 H1A.40 H1B.1 H1B.2 H1B.3 H1B.4 H1B.5 H1B.6 H1B.7 H1B.8 H1B.9 H1B.10 H1B.11 H1B.12 H2A.1 H2A.2 H2A.3 H2A.4 H2A.5 H2A.6 H2A.7 H2A.8 H2A.9 H2A.10 H2A.11 H2A.12 H2A.13 H2A.14 H2A.15 H2A.16 H2A.17 H2A.18 H2A.19 H2A.20 H2A.21 H2A.22 H2A.23 H2A.24 H2A.33 H2A.34 H2A.35 H2A.36 H2A.37 H2A.38 H2A.39 H2A.40 H2B.1 H2B.2 H2B.3 H2B.4 H2B.5 H2B.6 H2B.7 H2B.8 H2B.9 H2B.10 H2B.11 H2B.12 J3.10 J3.12 U1.6 U1.8 U1.10 U1.12 U3.6 U3.8 U3.11 U4.10 U4.13 U5.5 U6.5

## Polygon pours and split planes (outlines as drawn)
3V3LOAD on Top Layer "3V3LOAD_L01_P000" (solid, pour order 0): 1455,694.72 1650,694.72 1650,805.28 1455,805.28
3V3LOAD on Top Layer "ed" (solid, pour order 1): 1450,550 1650,550 1650,350 1450,350
no net on Top Layer "NONET_L01_P010" (solid, pour order 10): 1528.82,1246.18
3V3 on Top Layer "3V3_L01_P009" (solid, pour order 9): 1448.72,1357.11 1646.28,1357.11 1646.28,1250 1448.72,1250
GND on Top Layer "GND_L01_P008" (solid, pour order 8): 0,3690 0,0 3465,0 3465,3690
5V on Top Layer "5V_L01_P007" (solid, pour order 7): 460,1025 640,1025 640,925 460,925
5VLOAD on Top Layer "5VLOAD_L01_P005" (solid, pour order 5): 1250,550 1430,550 1430,350 1250,350
5VLOAD on Top Layer "5VLOAD_L01_P002" (solid, pour order 2): 460,480 640,480 640,375 460,375
GND on Bottom Layer "GND_L02_P003" (solid, pour order 3): 0,3690 3465,3690 3465,0 0,0
no net on Top Solder "NONET_L-01_P-001" (solid): 265,835 625,835 625,560 265,560
no net on Top Solder "NONET_L-01_P-001" (solid): 1450,1345 1645,1345 1645,1250 1455,1250 1450,1255
no net on Top Solder "NONET_L-01_P-001" (solid): 1455,805 1650,805 1650,695 1455,695
no net on Top Solder "NONET_L-01_P-001" (solid): 455,480 645,480 645,375 455,375
no net on Top Solder "NONET_L-01_P-001" (solid): 645,1025 645,920 455,920 455,1025

## Keep-outs
Top Layer:
  rectangle: 1850,1225 2750,2080

## Text inside footprints (layer, text, board x,y; h text height)
C2: Top Overlay "+" at 2520,2912.6 h59.06 r180
C3: Top Overlay "+" at 1620,2687.6 h59.06 r180
C4: Top Overlay "+" at 1620,2912.6 h59.06 r180
C5: Top Overlay "+" at 2520,2687.6 h59.06 r180
H1A: Top Overlay "2" at 400,3310 h50; Top Overlay "1" at 400,3210 h50
H2A: Top Overlay "2" at 400,3510 h50; Top Overlay "1" at 400,3410 h50
J3: Top Overlay "2" at 1200,480 h50; Top Overlay "1" at 1200,380 h50; Top Overlay "15" at 2060,380 h50; Top Overlay "16" at 2060,480 h50